# Altium PCB PCB.pcbdoc (part 3 of 3)
Units mm, origin at the board's own origin, x right, y up, seen from the top; angles counter-clockwise.
Board outline 351.03 x 186.31 mm, 2 copper layers (Top Layer, Bottom Layer); 478 components, 293 nets, 1523 pads, 747 vias.
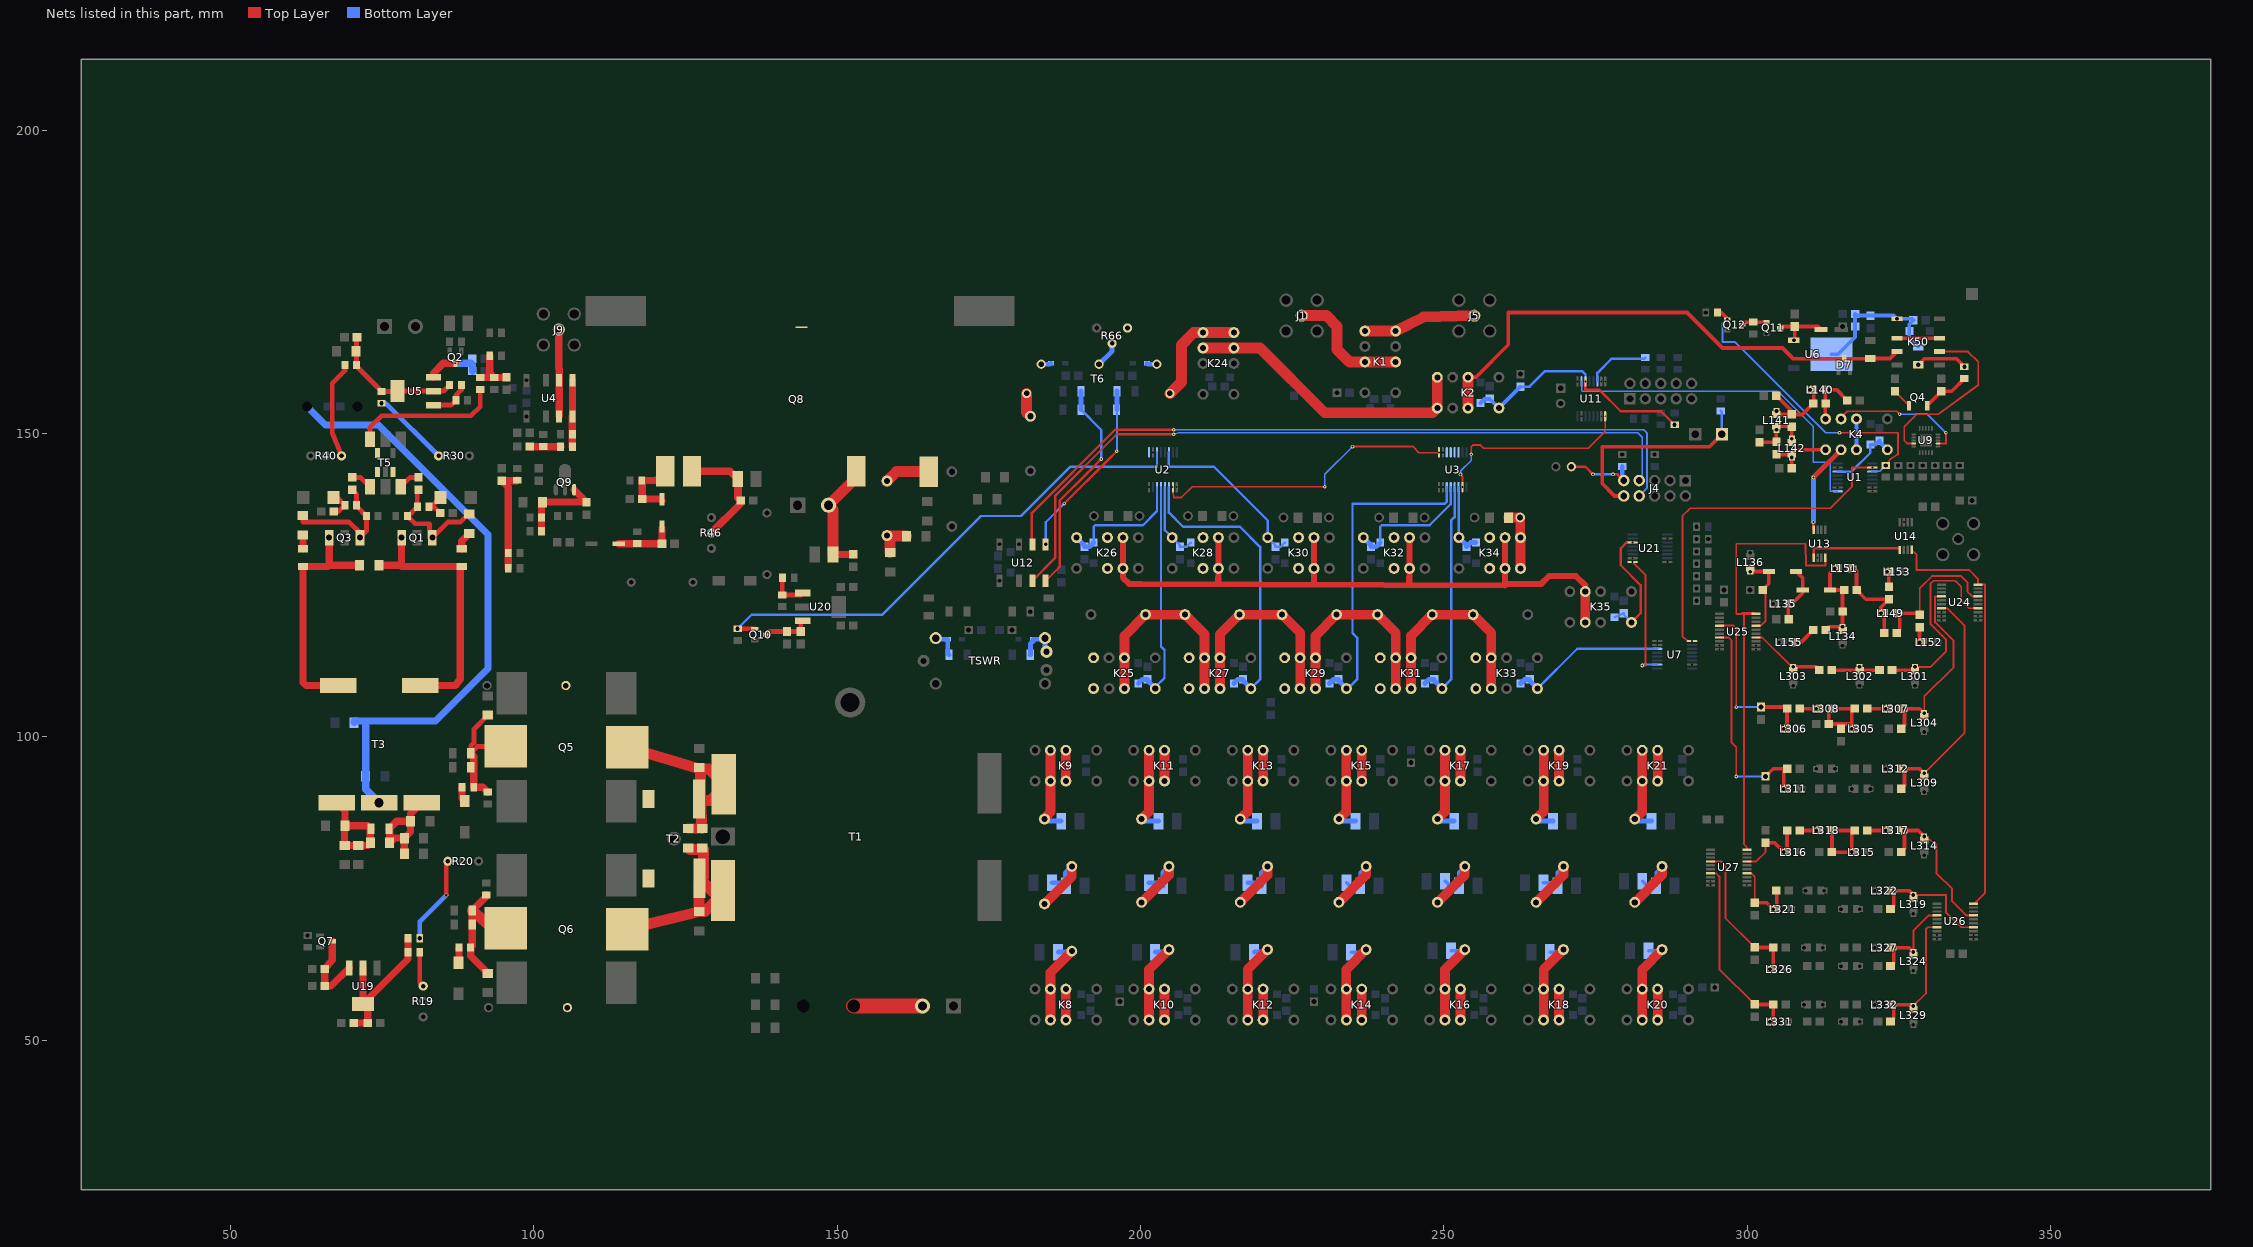
[diagram p3: the nets of this part, all layers, seen from the top]

## Via types
v1: diameter 1, hole 0.61, Top Layer to Bottom Layer, 525 vias
v2: diameter 0.61, hole 0.305, Top Layer to Bottom Layer, 207 vias
v3: diameter 4, hole 3.1, Top Layer to Bottom Layer, 7 vias
v4: diameter 0.61, hole 0.306, Top Layer to Bottom Layer, 3 vias
v5: diameter 0.5, hole 0.305, Top Layer to Bottom Layer, 3 vias
v6: diameter 0.61, hole 0.4, Top Layer to Bottom Layer, 1 vias
v7: diameter 1, hole 0.4, Top Layer to Bottom Layer, 1 vias

## Nets (pads, with @x,y where several pads share a name; then routed paths per layer and width w, separated by ;. In a path a pad name is that pad's centre, name@x,y a point inside that pad or via, vN(x,y) a via of type N, cw(c..) or ccw(c..) an arc to the next point about the centre after c; other vN are vias at no path point) (continued)
K1_8: J5.5 K1.5 K1.8 | length 18.6
  Top Layer w1.8: K1.8@236.982,166.878 K1.5@242.062,166.878 ; K1.5@242.072,166.888 246.634,169.164 J5.5@255.026,169.428
K1_10: J1.5 K1.3 K1.10 | length 20.9
  Top Layer w1.8: J1.5@226.568,169.418 230.632,169.418 232.41,167.64 232.41,163.83 234.442,161.798 K1.10@236.982,161.798 K1.3@242.062,161.798
K4_5: C201.1 C204.2 K4.5 L140.1 | length 11.5
  Top Layer w0.61: K4.5@312.928,152.4 312.878,152.45 L140.1@312.878,157.226 ; C201.1@312.942,154.94 312.878,155.004 L140.1@312.878,157.226 ; C204.2@316.47,155.448 314.692,157.226 L140.1@312.878,157.226
K4_8: C203.2 C210.1 K4.8 L142.2 | length 10.8
  Top Layer w0.61: C203.2@304.8,146.544 307.276,146.544 307.34,146.608 308.052,147.32 K4.8@312.928,147.32 ; L142.2@307.34,146.609 C210.1@307.354,144.272
K4_10: K4.3 K4.10 | length 5.1
  Bottom Layer w0.61: K4.10@318.008,147.32 K4.3@318.008,152.4
K8_9: C12.2 K8.4 K8.9 L7.1 | length 15.1
  Top Layer w1.6: K8.9@185.166,53.34 K8.4@185.166,58.42 185.166,61.163 L7.1@188.686,64.683
  Bottom Layer w0.8: C12.2@186.505,64.516 188.519,64.516 L7.1@188.686,64.683
K8_10: K8.3 K8.10 | length 5.1
  Top Layer w1.6: K8.10@187.706,53.34 K8.3@187.706,58.42
K9_10: K9.3 K9.10 | length 5.1
  Top Layer w1.6: K9.10@187.706,92.71 K9.3@187.706,97.79
K10_10: K10.3 K10.10 | length 5.1
  Top Layer w1.6: K10.10@203.962,53.34 K10.3@203.962,58.42
K11_9: C20.2 K11.4 K11.9 L11.2 | length 14.8
  Top Layer w1.6: L11.2@200.188,86.447 201.422,87.681 K11.9@201.422,92.71 K11.4@201.422,97.79
  Bottom Layer w0.8: L11.2@200.188,86.447 200.529,86.106 C20.2@202.953,86.106
K11_10: K11.3 K11.10 | length 5.1
  Top Layer w1.6: K11.10@203.962,92.71 K11.3@203.962,97.79
K12_9: C22.2 K12.4 K12.9 L13.1 | length 15.3
  Top Layer w1.6: K12.9@217.678,53.34 K12.4@217.678,58.42 217.678,61.671 L13.1@220.944,64.937
  Bottom Layer w0.8: C22.2@218.763,64.516 220.523,64.516 L13.1@220.944,64.937
K12_10: K12.3 K12.10 | length 5.1
  Top Layer w1.6: K12.10@220.218,53.34 K12.3@220.218,58.42
K13_10: K13.3 K13.10 | length 5.1
  Top Layer w1.6: K13.10@220.218,92.71 K13.3@220.218,97.79
K14_9: C27.2 K14.4 K14.9 L16.1 | length 15.6
  Top Layer w1.6: K14.9@233.934,53.34 K14.4@233.934,58.42 233.934,61.671 L16.1@237.2,64.937
  Bottom Layer w0.61: C27.2@234.765,64.516 236.779,64.516 L16.1@237.2,64.937
K14_10: K14.3 K14.10 | length 5.1
  Top Layer w1.6: K14.10@236.474,53.34 K14.3@236.474,58.42
K15_10: K15.3 K15.10 | length 5.1
  Top Layer w1.6: K15.10@236.474,92.71 K15.3@236.474,97.79
K16_9: C32.2 K16.4 K16.9 L19.1 | length 15.2
  Top Layer w1.6: K16.9@250.19,53.34 K16.4@250.19,58.42 250.19,61.671 L19.1@253.456,64.937
  Bottom Layer w0.61: C32.2@251.275,64.77 253.289,64.77 L19.1@253.456,64.937
K16_10: K16.3 K16.10 | length 5.1
  Top Layer w1.6: K16.10@252.73,53.34 K16.3@252.73,58.42
K17_10: K17.3 K17.10 | length 5.1
  Top Layer w1.6: K17.10@252.73,92.71 K17.3@252.73,97.79
K18_9: C37.2 K18.4 K18.9 L22.1 | length 15.3
  Top Layer w1.6: K18.9@266.446,53.34 K18.4@266.446,58.42 266.446,61.671 L22.1@269.712,64.937
  Bottom Layer w0.61: C37.2@267.531,64.516 269.291,64.516 L22.1@269.712,64.937
K18_10: K18.3 K18.10 | length 5.1
  Top Layer w1.6: K18.10@268.986,53.34 K18.3@268.986,58.42
K19_10: K19.3 K19.10 | length 5.1
  Top Layer w1.6: K19.10@268.986,92.71 K19.3@268.986,97.79
K20_9: C43.2 K20.4 K20.9 L25.1 | length 15.2
  Top Layer w1.6: K20.9@282.702,53.34 K20.4@282.702,58.42 282.702,61.671 L25.1@285.968,64.937
  Bottom Layer w0.61: C43.2@283.787,64.77 285.801,64.77 L25.1@285.968,64.937
K20_10: K20.3 K20.10 | length 5.1
  Top Layer w1.6: K20.10@285.242,53.34 K20.3@285.242,58.42
K21_10: K21.3 K21.10 | length 5.1
  Top Layer w1.6: K21.10@285.242,92.71 K21.3@285.242,97.79
K25_5: K25.5
K25_8: K25.8
K25_10: K25.3 K25.10 K27.4 K27.9 L35.2 L36.1 | length 33.7
  Top Layer w1.6: K25.10@197.358,107.95 K25.3@197.358,113.03 197.358,116.658 L35.2@200.842,120.142 L36.1@207.336,120.142 210.566,116.912 K27.4@210.566,113.03 K27.9@210.566,107.95
K26_3: K26.3
K26_10: K26.10
K27_5: K27.5
K27_8: K27.8
K27_10: K27.3 K27.10 K29.4 K29.9 L36.2 L39.1 | length 34
  Top Layer w1.6: K27.10@213.106,107.95 K27.3@213.106,113.03 213.106,116.912 L36.2@216.336,120.142 L39.1@223.338,120.142 226.314,117.166 K29.4@226.314,113.03 K29.9@226.314,107.95
K28_3: K28.3
K28_10: K28.10
K29_5: K29.5
K29_8: K29.8
K29_10: K29.3 K29.10 K31.4 K31.9 L39.2 L41.1 | length 33.8
  Top Layer w1.6: K29.10@228.854,107.95 K29.3@228.854,113.03 228.854,116.658 L39.2@232.338,120.142 L41.1@239.086,120.142 242.062,117.166 K31.4@242.062,113.03 K31.9@242.062,107.95
K30_3: K30.3
K30_10: K30.10
K31_5: K31.5
K31_8: K31.8
K31_10: K31.3 K31.10 K33.4 K33.9 L41.2 L42.1 | length 33.8
  Top Layer w1.6: K31.10@244.602,107.95 K31.3@244.602,113.03 244.602,116.658 L41.2@248.086,120.142 L42.1@254.834,120.142 257.81,117.166 K33.4@257.81,113.03 K33.9@257.81,107.95
K32_3: K32.3
K32_10: K32.10
K33_5: K33.5
K33_8: K33.8
K34_3: K34.3
K34_8: C88.1 C100.1 K34.5 K34.8 | length 10.3
  Top Layer w1.6: C88.1@260.673,136.144 C100.1@262.576,136.144 262.576,132.902 K34.8@262.636,132.842 K34.5@262.636,127.762
K34_10: K34.10
K35_9: K26.4 K26.9 K28.4 K28.9 K30.4 K30.9 K32.4 K32.9 K34.4 K34.9 K35.4 K35.9 | length 121.4
  Top Layer w1: K26.9@197.104,132.842 K26.4@197.104,127.762 197.104,126.238 198.12,125.222 200.152,125.222 260.096,124.968 K34.4@260.096,127.762 K34.9@260.096,132.842 ; 212.827,125.171 K28.4@212.852,127.762 K28.9@212.852,132.842 ; 228.599,125.095 K30.4@228.6,127.762 K30.9@228.6,132.842 ; 244.297,125.044 K32.4@244.348,127.762 K32.9@244.348,132.842 ; 260.223,125.222 262.509,125.222 266.065,125.222 267.335,126.492 271.78,126.492 273.304,124.968 K35.4@273.304,123.952
  Top Layer w1.6: K35.9@273.304,118.872 K35.4@273.304,123.952
K50_2: K50.2 K50.7 | length 7
  Top Layer w0.61: K50.2@324.668,165.7 K50.7@331.668,165.7
L1_2: C2.2 C4.2 L1.2 | length 6.3
  Top Layer w1.8: C4.2@158.75,130.371 158.75,132.66 L1.2@158.242,133.168 158.314,133.096 C2.2@161.475,133.096
L7_2: C13.2 C14.2 L7.2 L8.1 | length 14.1
  Top Layer w1.6: L7.2@184.186,72.477 188.686,76.977 L8.1@188.686,78.653
  Bottom Layer w0.8: C13.2@185.413,75.946 187.129,75.946 187.637,75.438 187.637,77.604 L8.1@188.686,78.653
L8_2: C15.2 K9.4 K9.9 L8.2 | length 14.6
  Top Layer w1.6: L8.2@184.186,86.447 185.166,87.63 K9.9@185.166,92.71 K9.4@185.166,97.79
  Bottom Layer w0.8: L8.2@184.186,86.447 184.527,86.106 C15.2@186.951,86.106
L10_1: C17.2 K10.4 K10.9 L10.1 | length 15.3
  Top Layer w1.6: K10.9@201.422,53.34 K10.4@201.422,58.42 201.422,61.671 L10.1@204.688,64.937
  Bottom Layer w0.8: C17.2@202.507,64.516 204.267,64.516 L10.1@204.688,64.937
L11_1: C18.2 C19.2 L10.2 L11.1 | length 13.9
  Top Layer w1.6: L10.2@200.188,72.731 204.688,77.231 L11.1@204.688,78.653
  Bottom Layer w0.8: C19.2@201.415,75.946 203.207,75.946 C18.2@203.715,75.438 203.715,77.68 L11.1@204.688,78.653
L13_2: C23.2 C24.2 L13.2 L14.1 | length 13.9
  Top Layer w1.6: L13.2@216.444,72.731 220.944,77.231 L14.1@220.944,78.653
  Bottom Layer w0.8: C23.2@217.671,75.946 219.463,75.946 C24.2@219.971,75.438 219.971,77.68 L14.1@220.944,78.653
L14_2: C25.2 K13.4 K13.9 L14.2 | length 14.8
  Top Layer w1.6: L14.2@216.444,86.447 217.678,87.681 K13.9@217.678,92.71 K13.4@217.678,97.79
  Bottom Layer w0.8: L14.2@216.444,86.447 216.785,86.106 C25.2@219.209,86.106
L16_2: C28.2 C29.2 L16.2 L17.1 | length 13.8
  Top Layer w1.6: L16.2@232.7,72.731 237.2,77.231 L17.1@237.2,78.653
  Bottom Layer w0.61: C29.2@234.003,75.946 234.511,75.438 C28.2@236.227,75.438 236.227,77.679 L17.1@237.2,78.653
L17_2: C30.2 K15.4 K15.9 L17.2 | length 14.8
  Top Layer w1.6: L17.2@232.7,86.447 233.934,87.681 K15.9@233.934,92.71 K15.4@233.934,97.79
  Bottom Layer w0.8: L17.2@232.7,86.447 233.041,86.106 C30.2@235.465,86.106
L19_2: C33.2 C34.2 L19.2 L20.1 | length 13.9
  Top Layer w1.6: L19.2@248.956,72.731 253.456,77.231 L20.1@253.456,78.653
  Bottom Layer w0.61: C33.2@250.259,76.2 251.021,75.438 C34.2@252.483,75.438 252.483,77.679 L20.1@253.456,78.653
L20_2: C35.2 K17.4 K17.9 L20.2 | length 14.8
  Top Layer w1.6: L20.2@248.956,86.447 250.19,87.681 K17.9@250.19,92.71 K17.4@250.19,97.79
  Bottom Layer w0.8: L20.2@248.956,86.447 249.297,86.106 C35.2@251.721,86.106
L22_2: C39.2 C40.2 L22.2 L23.1 | length 13.9
  Top Layer w1.6: L22.2@265.212,72.731 269.712,77.231 L23.1@269.712,78.653
  Bottom Layer w0.61: C39.2@266.439,75.946 268.231,75.946 C40.2@268.739,75.438 268.739,77.679 L23.1@269.712,78.653
L23_2: C41.2 K19.4 K19.9 L23.2 | length 14.8
  Top Layer w1.6: L23.2@265.212,86.447 266.446,87.681 K19.9@266.446,92.71 K19.4@266.446,97.79
  Bottom Layer w0.8: L23.2@265.212,86.447 265.553,86.106 C41.2@267.977,86.106
L25_2: C44.2 C45.2 L25.2 L26.1 | length 13.9
  Top Layer w1.6: L25.2@281.468,72.731 285.968,77.231 L26.1@285.968,78.653
  Bottom Layer w0.61: C44.2@282.771,76.2 283.533,75.438 C45.2@284.995,75.438 284.995,77.679 L26.1@285.968,78.653
L26_2: C46.2 K21.4 K21.9 L26.2 | length 14.8
  Top Layer w1.6: L26.2@281.468,86.447 282.702,87.681 K21.9@282.702,92.71 K21.4@282.702,97.79
  Bottom Layer w0.8: L26.2@281.468,86.447 281.809,86.106 C46.2@284.233,86.106
L30_2: J6.2 L30.2 pad.1 | length 11.3
  Top Layer w2.5: L30.2@152.74,55.626 J6.2@164.084,55.626
L32_2: C65.2 C66.1 C72.2 L32.2 | length 9.7
  Top Layer w1.2: C65.2@114.01,131.826 C72.2@121.144,131.826 ; C72.2@121.144,131.826 C66.1@121.158,134.402
L43_1: C95.2 C105.2 L43.1 T3.P3 | length 100.1
  Bottom Layer w1.2: L43.1@62.652,154.432 65.7,151.384 74.422,151.384 92.456,133.35 92.456,111.252 83.82,102.616 70.427,102.616 C95.2@70.427,102.362 ; 72.321,101.854 C105.2@72.321,93.472 72.321,91.357 T3.P3@74.524,89.154
L46_2: L46.2 R39.1 | length 8.6
  Top Layer w0.61: R39.1@328.168,161.29 329.184,162.306 334.468,162.306 L46.2@335.788,160.986
L135_2: C386.2 C387.1 C389.2 L135.2 | length 9.1
  Top Layer w0.61: L135.2@306.782,121.92 306.782,119.444 C389.2@306.846,119.38 ; L135.2@307.366,121.94 309.154,123.728 C386.2@309.154,124.206 309.154,126.166 C387.1@308.066,127.254
L140_2: C201.2 C202.1 C207.2 L140.2 L141.1 | length 15.8
  Top Layer w0.61: L141.1@304.8,153.112 309.053,153.111 C201.2@310.882,154.94 310.946,155.004 L140.2@310.946,157.226 ; L141.1@304.8,153.112 304.864,153.176 307.34,153.176 307.34,153.685 C207.2@304.814,156.21
L141_2: C202.2 C203.1 C208.2 L141.2 L142.1 | length 13.1
  Top Layer w0.61: C208.2@302.006,148.576 304.772,148.576 304.8,148.604 304.8,151.129 L141.2@304.851,151.18 ; L142.1@307.34,148.54 C202.2@307.34,151.116 ; C202.2@307.276,151.18 C202.2@307.34,151.116 ; C202.2@307.276,151.18 L141.2@304.8,151.18 C202.2@307.276,151.18 ; C202.2@307.276,151.18 C202.2@307.34,151.116
L149_2: C308.2 C310.1 C317.2 L149.2 L151.1 | length 16
  Top Layer w0.61: L151.1@317.526,127.742 318.022,127.246 C310.1@318.022,124.206 ; C310.1@318.022,124.206 319.547,122.669 C317.2@323.342,122.669 ; C308.2@322.566,117.094 322.566,119.856 L149.2@322.046,120.376 322.046,121.372 C317.2@323.342,122.668
L151_2: C310.2 C319.2 C386.1 C388.2 L134.2 L151.2 | length 15.3
  Top Layer w0.61: C319.2@312.942,117.602 313.476,118.136 L134.2@315.702,118.136 315.702,123.946 C310.2@315.962,124.206 C386.1@313.654,124.206 313.654,126.97 L151.2@314.426,127.742
L152_2: C316.1 L152.2 | length 2.6
  Top Layer w0.61: L152.2@328.396,115.55 328.396,118.07 C316.1@328.422,118.096
L153_2: C317.1 L153.2 | length 2.6
  Top Layer w0.61: L153.2@323.062,127.234 323.342,126.954 C317.1@323.342,124.728
L155_2: C319.1 L155.2 | length 3.9
  Top Layer w0.61: L155.2@307.798,115.57 308.85,115.57 C319.1@310.882,117.602
L302_2: C305.2 C306.1 L302.2 | length 7.8
  Top Layer w0.61: C306.1@313.958,110.998 C305.2@321.804,110.998
L305_2: C307.2 C311.2 C314.2 L305.2 L308.1 | length 14.8
  Top Layer w0.61: L305.2@317.22,101.326 317.22,104.128 C311.2@317.74,104.648 L308.1@313.894,104.648 313.45,104.204 C314.2@313.45,102.108 317.042,102.108 L305.2@317.804,101.346
L307_2: C311.1 L307.2 | length 3
  Top Layer w0.61: C311.1@319.8,104.648 L307.2@322.808,104.628
L308_2: C312.1 L308.2 | length 2.8
  Top Layer w0.61: C312.1@308.624,104.648 L308.2@311.378,104.628
L315_2: C332.2 C335.2 L315.2 L318.1 | length 14.1
  Top Layer w0.61: C335.2@313.958,81.026 313.958,84.042 L318.1@314.478,84.562 C332.2@317.74,84.582 ; C335.2@313.958,81.026 L315.2@317.22,81.006 317.22,84.062 C332.2@317.74,84.582
L317_2: C332.1 L317.2 | length 3
  Top Layer w0.61: C332.1@319.8,84.582 L317.2@322.808,84.562
L318_2: C333.1 L318.2 | length 2.8
  Top Layer w0.61: C333.1@308.624,84.582 L318.2@311.378,84.562
LNAON: Q12.1 R57.2 R75.1 U1.3 | length 50.7
  Top Layer w0.305: v2(315.214,150.114) 324.866,150.114 324.866,149.606 324.866,146.558 323.596,145.796 R57.2@322.834,144.73
  Top Layer w0.61: R75.1@295.098,169.926 295.725,169.926 Q12.1@296.807,168.844
  Bottom Layer w0.305: Q12.1@296.926,168.91 296.672,168.91 295.91,168.148 295.91,165.1 297.942,165.1 312.928,150.114 v2(315.214,150.114) ; U1.3@320.548,143.764 321.868,143.764 R57.2@322.834,144.73
LPFON: C123.1 D9.2 K4.12 U1.14 | length 11.9
  Bottom Layer w0.4: U1.14@314.888,143.723 317.205,143.723 320.294,146.812 D9.2@320.294,148.16
  Bottom Layer w0.61: D9.2@320.294,148.16 321.148,148.16 C123.1@321.818,148.83 321.818,148.59 K4.12@323.088,147.32
MBALC: D2.1 J4.10 R12.1 | length 35
  Top Layer w0.61: J4.10@279.654,139.7 278.13,139.7 276.098,141.732 276.098,147.828 293.792,147.828 D2.1@295.824,149.86
  Bottom Layer w0.4: R12.1@295.656,153.72 295.824,153.552 D2.1@295.824,149.86
MBTHERM: J4.9 R13.2 R14.2 | length 12
  Top Layer w0.4: R14.2@271.018,144.526 273.304,144.526 v2(274.574,143.256) ; v2(277.876,143.256) 278.638,143.256 J4.9@279.654,142.24
  Bottom Layer w0.4: v2(274.574,143.256) v2(277.876,143.256)
  Bottom Layer w0.8: R13.2@279.4,144.576 279.4,142.494 J4.9@279.654,142.24
Q1_3: C93.1 Q1.3 R59.1 T3.P1 | length 44.2
  Top Layer w1.2: C93.1@74.491,128.27 78.232,128.27 ; Q1.3@78.232,132.842 78.232,128.27 ; T3.P1@81.28,108.458 87.122,108.458 87.884,109.474 87.884,127.813 R59.1@88.138,128.067 ; R59.1@88.138,128.061 78.232,128.061 78.232,128.27
Q3_3: C93.2 Q3.3 R60.2 T3.P2 | length 39.1
  Top Layer w1.2: Q3.3@66.294,132.842 66.294,128.27 ; T3.P2@67.818,108.458 62.484,108.458 61.976,108.966 R60.2@61.976,128.061 66.085,128.061 66.294,128.27 ; C93.2@71.305,128.27 66.294,128.27
Q4_1: C112.2 Q4.1 | length 3.3
  Top Layer w0.305: C112.2@324.358,156.958 324.358,156.91 Q4.1@326.668,154.6
Q4_3: C120.2 L46.1 Q4.3 | length 8
  Top Layer w0.61: Q4.3@329.668,154.6 331.978,156.91 C120.2@331.978,156.958 333.692,156.958 L46.1@335.788,159.054
Q5_D: C52.1 C57.2 C60.2 Q5.D T1.2 T2.4 | length 34.9
  Top Layer w1.6: C57.2@125.476,84.905 C60.2@127.762,84.905
  Top Layer w1.8: Q5.D@115.443,98.298 C52.1@127.508,94.673 ; T2.4@127.522,89.504 129.128,89.504 131.572,91.948 128.847,94.673 C52.1@127.508,94.673 ; C60.2@127.762,84.905 127.523,89.505 C52.1@127.508,94.673
Q6_D: C56.2 C57.1 C60.1 Q6.D T1.1 T2.3 | length 36.2
  Top Layer w1.8: Q6.D@116.136,67.633 Q6.D@115.443,68.326 C56.2@127.254,71.189 ; C57.1@125.73,81.465 128.016,81.465 128.016,76.872 T2.3@127.573,76.429 ; C56.2@127.254,71.189 127.254,76.11 T2.3@127.573,76.429 ; C56.2@127.254,71.189 128.212,71.189 131.445,74.422 129.58,74.422 T2.3@127.573,76.429
Q8_1: C66.2 C73.2 L34.2 Q8.1 | length 11
  Top Layer w1.2: C66.2@121.158,138.902 120.868,139.192 C73.2@117.87,139.192 117.87,142.176 L34.2@117.806,142.24 120.142,142.24 Q8.1@121.666,143.764
Q8_2: C75.1 C77.1 Q8.2 R46.2 | length 22.9
  Top Layer w0.4: C77.1@133.627,142.494 134.098,142.023 C75.1@134.098,138.938
  Top Layer w1.2: Q8.2@126.111,143.764 132.357,143.764 C77.1@133.627,142.494 133.627,139.409 C75.1@134.098,138.938 134.098,138.426 R46.2@129.286,133.614
Q8_3: C70.1 C74.1 J7.2 Q8.3 | length 19.2
  Top Layer w1.2: C74.1@149.329,130.048 C70.1@152.654,130.061
  Top Layer w1.8: C74.1@149.329,130.048 149.329,137.437 J7.2@148.59,138.176 153.162,142.748 Q8.3@153.162,143.764
Q8_4: L1.1 Q8.4 | length 7.5
  Top Layer w1.8: L1.1@158.242,142.168 159.775,143.701 Q8.4@165.1,143.701
Q8_5: Q8.5
Q9_D: C67.1 L31.1 Q9.D R21.1 R22.1 | length 15.1
  Top Layer w1.2: R22.1@101.296,133.858 101.296,138.566 L31.1@101.415,138.684 108.712,138.697 Q9.D@106.656,140.736
Q11_1: Q11.1 Q12.3 R48.1 | length 4.2
  Top Layer w0.61: Q12.3@299.077,167.894 299.535,168.352 R48.1@300.99,168.352 ; R48.1@300.99,168.352 Q11.1@303.093,168.336
R1_2: R1.2 T2.2
R2_2: R2.2 T2.1
R5_1: D35.1 R5.1 | length 2.8
  Top Layer w1.2: D35.1@87.63,62.509 87.68,62.559 R5.1@87.68,65.278
R5_2: C54.1 Q6.G R5.2 R47.2 R76.2 R77.1 | length 21.6
  Top Layer w1.2: R5.2@89.612,65.278 89.611,63.873 C54.1@92.456,61.029 ; R5.2@89.612,65.278 89.871,65.537 R47.2@89.871,71.374 92.202,73.705 R77.1@92.202,73.964
  Top Layer w1.8: R47.2@89.871,71.374 92.202,69.342 Q6.G@95.377,68.453
R6_1: D36.1 R6.1 | length 2.5
  Top Layer w1.2: R6.1@88.188,91.694 88.188,89.892 D36.1@88.646,89.434
R6_2: C53.1 Q5.G R6.2 R38.2 R74.2 R78.2 | length 22.2
  Top Layer w0.8: C53.1@92.456,103.563 90.17,101.277 90.17,99.06 89.617,98.507 R38.2@89.617,97.282 90.76,98.425 Q5.G@95.377,98.425
  Top Layer w1.2: R38.2@89.617,97.282 90.12,96.779 R6.2@90.12,91.694 91.644,91.694 R78.2@92.456,90.882
R15_1: C59.1 C62.1 R15.1 R16.1 U19.2 U19.4 | length 25.6
  Top Layer w1.2: C59.1@70.372,52.832 C62.1@72.63,52.832 72.63,55.21 U19.4@71.882,55.958 U19.2@71.882,61.898 ; U19.4@71.882,55.958 79.299,63.373 R16.1@79.298,64.516 ; R16.1@79.298,64.516 R15.1@79.298,66.802
R15_2: R15.2 R20.3 | length 14.6
  Top Layer w0.8: v6(85.598,73.914) 85.598,79.258 R20.3@85.842,79.502
  Bottom Layer w0.8: R15.2@81.23,66.802 81.23,69.546 v6(85.598,73.914)
R16_2: R16.2 R19.1 | length 5.8
  Top Layer w0.8: R16.2@81.23,64.516 81.23,59.496 R19.1@81.788,58.938
R23_1: C71.1 R23.1 R24.2 | length 5.1
  Top Layer w1.2: C71.1@99.328,147.828 R23.1@104.444,147.828
R26_1: C76.2 R26.1 R32.2 R37.2 | length 17.5
  Top Layer w1.2: R32.2@95.808,127.762 R37.2@95.808,130.302 95.808,141.16 C76.2@94.742,142.226 97.218,142.226 R26.1@97.282,142.29
R27_1: C114.1 D18.1 R27.1 | length 4.7
  Top Layer w0.8: C114.1@84.568,136.906 83.552,137.922 R27.1@82.754,137.922 83.098,137.922 D18.1@84.622,139.446
R27_2: C38.1 C111.2 Q1.1 R27.2 R42.2 | length 19.7
  Top Layer w0.8: R42.2@79.198,136.398 80.467,135.128 82.804,135.128 82.804,132.842 Q1.1@83.312,132.842 85.852,135.382 87.884,135.382 89.223,136.721 C111.2@89.408,136.721 ; R42.2@79.198,136.398 79.298,136.398 R27.2@80.822,137.922 80.822,140.498 C38.1@81.026,140.702
R28_1: C128.1 C137.1 R28.1 R29.1 R52.2 U5.2 U5.4 | length 22.3
  Top Layer w0.8: C137.1@70.88,165.862 70.816,165.798 R29.1@70.816,161.29 70.816,161.036 R28.1@74.93,156.922 77.498,156.922 U5.4@77.548,156.972 U5.2@83.488,156.972 85.14,156.972 R52.2@86.156,157.988
R28_2: R28.2 R30.1 | length 13
  Bottom Layer w0.8: R28.2@74.93,154.99 75.631,154.991 R30.1@84.318,146.304
R29_2: R29.2 R40.3 | length 16.1
  Top Layer w0.8: R40.3@68.336,146.304 66.802,150.114 66.802,158.242 68.884,160.324 R29.2@68.884,161.29
R34_1: C91.2 C92.1 C94.1 C101.1 R34.1 T3.S1 | length 18.7
  Top Layer w1.2: C92.1@78.671,80.772 C94.1@78.671,83.312 ; T3.S1@81.534,89.154 79.687,87.307 C91.2@79.687,86.106 ; C94.1@78.671,83.312 77.031,83.312 C101.1@76.269,82.55 76.269,84.722 R34.1@76.155,84.836 77.425,86.106 C91.2@79.687,86.106 ; C94.1@78.671,83.312 79.687,84.328 C91.2@79.687,86.106
R34_2: C101.2 C102.1 C103.2 C104.1 R34.2 T3.S2 | length 18.9
  Top Layer w1.2: T3.S2@67.564,89.154 68.903,87.815 C103.2@68.903,85.344 ; C103.2@68.903,85.344 68.834,85.275 C104.1@68.834,82.111 72.644,82.111 C101.2@73.083,82.55 73.083,84.722 R34.2@73.197,84.836 72.689,85.344 C103.2@68.903,85.344
R39_2: C121.2 C122.2 C127.2 C133.1 D51.1 K50.1 R39.2 U6.4 | length 24.1
  Bottom Layer w0.61: U6.4@313.893,163.068 314.96,163.068 317.754,165.862 C121.2@317.768,167.64 ; C121.2@317.768,167.64 C122.2@317.768,169.672 318.008,169.432 C127.2@320.294,169.432 324.136,169.432 K50.1@324.668,168.9 327.148,168.9 C133.1@327.392,168.656 326.722,167.986 D51.1@326.722,166.878 326.722,165.739 R39.2@328.168,164.293
R44_1: C116.2 D23.1 R44.1 | length 4.6
  Top Layer w0.8: D23.1@67.016,139.446 67.614,139.446 R44.1@68.884,138.176 67.868,137.16 C116.2@67.07,137.16
R44_2: C80.1 C81.2 Q3.1 R43.1 R44.2 | length 21.3
  Top Layer w0.8: C81.2@61.976,136.467 61.976,135.382 69.596,135.382 71.374,133.604 Q3.1@71.374,132.842 72.44,133.908 R43.1@72.44,136.398 70.816,138.022 R44.2@70.816,138.176 70.816,139.99 C80.1@70.104,140.702
R59_2: C111.1 R59.2 | length 3
  Top Layer w1.2: R59.2@88.138,131.019 88.138,132.265 C111.1@89.408,133.535
R60_1: C81.1 R60.1 | length 2.3
  Top Layer w1.2: R60.1@61.976,131.019 C81.1@61.976,133.281
R62_2: C55.2 L48.1 R61.1 R62.2 | length 8.2
  Top Layer w1.2: L48.1@91.186,159.208 95.44,159.208 C55.2@95.504,159.272 ; R61.1@92.76,162.814 92.76,159.92 R62.2@93.472,159.208
R66_1: R66.1
RXATTOUT: K4.4 U9.2 | length 22.5
  Top Layer w0.305: K4.4@315.468,152.4 315.468,152.654 316.484,153.67 324.612,153.67 v4(325.12,153.162) ; U9.2@331.445,148.336 332.74,148.336 v4(332.74,150.114)
  Bottom Layer w0.305: v4(325.12,153.162) 329.692,153.162 v4(332.74,150.114)
RXINLNA: D7.3 K2.3 K2.10 K50.3 R73.2 | length 87
  Top Layer w0.61: K2.3@254,159.258 255.311,159.263 260.604,164.602 260.604,169.926 290.068,169.926 295.91,164.084 305.816,164.084 307.609,162.291 D7.3@315.976,162.29 ; D7.3@315.976,162.29 320.233,162.29 R73.2@320.294,162.351 323.519,162.351 K50.3@324.668,163.5
  Top Layer w1.8: K2.10@254,154.178 K2.3@254,159.258
RXLNAATT: K50.6 U9.14 | length 29.6
  Top Layer w0.305: U9.14@327.431,148.336 326.39,148.336 325.882,148.844 325.882,151.13 327.914,153.162 331.47,153.162 338.074,157.988 338.074,161.798 336.372,163.5 K50.6@331.668,163.5
RXLPFBPF: K4.9 U13.4 | length 15.1
  Top Layer w0.4: v2(310.896,135.382) 310.896,134.167 U13.4@310.937,134.126
  Top Layer w0.8: v2(310.896,142.748) K4.9@315.468,147.32
  Bottom Layer w0.8: v2(310.896,135.382) v2(310.896,142.748)
S$39: 
S$43: 
S$46: 
S$48: 
SWRDETBACKW: J4.8 U12.6 | length 123.4
  Top Layer w0.4: U12.6@182.184,131.73 182.118,131.796 182.118,136.906 195.834,150.622 v2(205.486,150.622)
  Bottom Layer w0.305: v2(205.486,150.622) 207.419,150.622 209.08,150.622 269.982,150.622 271.767,150.622 282.956,150.622 283.464,150.114 283.464,140.97 J4.8@282.194,139.7
SWRDETFORW: J4.7 U12.3 | length 124.2
  Top Layer w0.4: U12.3@182.184,125.73 185.928,129.474 185.928,139.7 196.088,149.86 v2(205.486,149.86)
  Bottom Layer w0.305: v2(205.486,149.86) 206.248,150.114 281.94,150.114 282.702,149.352 282.702,142.748 J4.7@282.194,142.24
T5_1: C38.2 T5.1 | length 3.6
  Top Layer w0.8: T5.1@78.092,141.199 79.656,142.762 C38.2@81.026,142.762
T5_3: C80.2 T5.3 | length 3.6
  Top Layer w0.8: C80.2@70.104,142.762 71.449,142.762 T5.3@73.012,141.199
T5_4: L48.2 T5.4 | length 24.4
  Top Layer w0.8: T5.4@73.012,149.073 73.012,150.99 74.93,152.908 89.662,152.908 91.186,154.432 L48.2@91.186,157.276
T6_3: D49.2 T6.3 | length 1.7
  Bottom Layer w0.8: T6.3@183.642,161.417 185.137,161.417 D49.2@185.263,161.544
T6_4: D50.2 T6.4 | length 1.7
  Bottom Layer w0.8: D50.2@201.071,161.544 201.197,161.417 T6.4@202.692,161.417
T6_5: R66.2 T6.5 | length 4.3
  Bottom Layer w0.8: T6.5@193.167,161.417 195.326,163.576 R66.2@195.326,164.846
TSWR_1: D1.2 R56.1 TSWR.1 | length 4.7
  Bottom Layer w0.8: TSWR.1@166.264,116.272 166.458,116.078 D1.2@168.245,116.078 168.246,113.74 R56.1@168.447,113.538
TSWR_2: D3.2 R55.2 TSWR.2 TSWR.6 | length 7.2
  Bottom Layer w0.8: R55.2@181.819,113.538 181.864,113.583 181.864,115.316 182.274,115.726 D3.2@182.275,116.078 184.07,116.078 TSWR.2@184.264,116.272 184.264,114.272 TSWR.6@184.514,114.022
TUNC1: C158.1 D39.2 K26.12 U2.6 | length 21.9
  Bottom Layer w0.4: D39.2@192.278,132.002 192.278,134.62 192.532,134.874 200.406,134.874 202.733,137.201 U2.6@202.733,141.152
  Bottom Layer w0.8: K26.12@189.484,132.842 190.754,131.572 C158.1@190.754,131.332 191.608,131.332 D39.2@192.278,132.002
TUNC2: C160.1 D41.2 K28.12 U2.4 | length 12.9
  Bottom Layer w0.4: U2.4@204.033,141.152 204.033,134.041 K28.12@205.232,132.842 206.502,131.572 C160.1@206.502,131.332 207.61,131.332 D41.2@208.28,132.002
TUNC3: C162.1 D43.2 K30.12 U2.14 | length 29
  Bottom Layer w0.4: U2.14@204.683,146.884 204.683,144.526 212.09,144.526 220.98,135.636 K30.12@220.98,132.842 222.25,131.572 C162.1@222.25,131.332 223.104,131.332 D43.2@223.774,132.002
TUNC4: C164.1 D45.2 K32.12 U3.5 | length 22.4
  Bottom Layer w0.4: D45.2@239.522,132.002 239.522,134.62 239.776,134.874 247.65,134.874 251.135,138.359 U3.5@251.135,141.152
  Bottom Layer w0.8: K32.12@236.728,132.842 237.998,131.572 C164.1@237.998,131.332 238.852,131.332 D45.2@239.522,132.002
TUNC5: C166.1 D47.2 K34.12 U3.3 | length 12.2
  Bottom Layer w0.4: U3.3@252.435,141.152 252.476,141.111 K34.12@252.476,132.842
  Bottom Layer w0.8: K34.12@252.476,132.842 253.746,131.572 C166.1@253.746,131.332 254.416,132.002 D47.2@255.27,132.002
TUNEOUT: R7.2 U11.6 | length 10.4
  Bottom Layer w0.4: U11.6@275.295,158.568 275.295,159.979 277.622,162.306 283.006,162.306 R7.2@283.21,162.51
TUNL1: C157.1 D38.2 K25.12 U2.5 | length 37.9
  Bottom Layer w0.4: K25.12@202.438,107.95 202.438,108.204 203.962,109.728 203.962,114.3 203.383,114.879 U2.5@203.383,141.152
  Bottom Layer w0.8: D38.2@199.644,108.79 200.314,109.46 201.168,109.46 201.168,109.22 K25.12@202.438,107.95
TUNL2: C159.1 D40.2 K27.12 U2.3 | length 49.4
  Bottom Layer w0.4: U2.3@204.683,141.152 204.683,136.947 207.01,134.62 216.408,134.62 219.71,131.318 219.71,109.474 K27.12@218.186,107.95
  Bottom Layer w0.8: D40.2@215.392,108.79 216.062,109.46 216.916,109.46 216.916,109.22 K27.12@218.186,107.95
TUNL3: C161.1 D42.2 K29.12 U3.6 | length 53.6
  Bottom Layer w0.4: K29.12@233.934,107.95 234.188,107.95 235.712,109.474 235.712,116.332 234.95,117.094 234.95,138.43 250.19,138.43 250.485,138.725 U3.6@250.485,141.152
  Bottom Layer w0.8: D42.2@231.14,108.79 231.81,109.46 232.664,109.46 232.664,109.22 K29.12@233.934,107.95
TUNL4: C163.1 D44.2 K31.12 U3.4 | length 37.9
  Bottom Layer w0.4: K31.12@249.682,107.95 251.206,109.474 251.206,135.636 251.785,136.215 U3.4@251.785,141.152
  Bottom Layer w0.8: D44.2@246.888,108.79 247.558,109.46 248.412,109.46 248.412,109.22 K31.12@249.682,107.95
TUNL5: C165.1 D46.2 K33.12 U7.6 | length 26.3
  Bottom Layer w0.4: K33.12@265.43,107.95 271.993,114.513 U7.6@285.17,114.513
  Bottom Layer w0.8: D46.2@262.636,108.79 263.306,109.46 264.16,109.46 264.16,109.22 K33.12@265.43,107.95
TUNT: C167.1 D48.2 K35.12 U21.14 | length 20.3
  Top Layer w0.4: K35.12@280.924,118.872 282.448,120.396 282.448,124.968 279.146,128.27 279.146,131.064 280.121,132.039 U21.14@281.106,132.039
  Bottom Layer w0.305: C167.1@279.654,120.382 279.654,120.142 K35.12@280.924,118.872
  Bottom Layer w0.4: D48.2@278.13,119.712 C167.1@279.654,120.382
TXLNABYPASS: K2.5 K2.8 K24.4 K24.9 | length 48.4
  Top Layer w1.8: K24.9@210.312,164.084 K24.4@215.392,164.084 219.71,164.084 230.378,153.416 248.158,153.416 K2.8@248.92,154.178 K2.5@248.92,159.258
TXPTTOUT: C110.1 C170.2 D8.2 K2.12 R10.1 U11.3 | length 40.5
  Top Layer w0.4: U11.3@273.304,158.496 273.304,157.226 275.59,157.226 279.146,153.67 285.8,153.67 R10.1@288.036,151.434
  Bottom Layer w0.4: C170.2@262.636,157.72 264.146,157.72 266.7,160.274 272.796,160.274 273.345,159.725 U11.3@273.345,158.568
  Bottom Layer w0.61: D8.2@256.032,155.018 256.702,155.688 C110.1@257.556,155.688 ; C110.1@257.556,155.689 K2.12@259.08,154.178 C170.2@262.636,157.721
U2_2: U2.2 U3.9 | length 50.5
  Top Layer w0.305: U2.2@205.333,141.152 205.486,139.446 206.756,139.446 208.534,141.224 v2(230.378,141.224) ; v2(234.95,147.828) 244.953,147.828 245.872,146.812 U3.9@249.185,146.884
  Bottom Layer w0.305: v2(230.378,141.224) 230.378,143.256 v2(234.95,147.828)
U2_9: U2.9
U3_11: U3.11
U3_12: U3.12
U3_13: U3.13
U3_14: U3.14
U4_3: J9.5 U4.3 U4.6 | length 14
  Top Layer w1.2: J9.5@104.14,167.132 104.14,160.782 104.206,160.716 ; U4.3@104.206,152.908 104.206,158.908 104.206,160.462
U5_1: R52.1 R53.2 U5.1 | length 6.9
  Top Layer w0.8: U5.1@83.488,154.672 86.396,154.672 R53.2@87.172,155.448 87.172,156.26 88.088,157.176 R52.1@88.088,157.988
U5_3: C126.1 C136.1 Q2.3 U5.3 | length 8.9
  Top Layer w1.2: U5.3@83.488,159.272 83.488,159.942 85.106,161.56 Q2.3@87.122,161.56
  Bottom Layer w1.2: Q2.3@87.122,161.56 89.674,161.56 89.902,161.332 C136.1@89.902,160.274
U6_3: C129.1 C130.2 Q11.3 U6.3 | length 9.3
  Top Layer w0.61: Q11.3@305.492,167.386 305.732,167.626 C130.2@307.848,167.626 ; U6.3@307.696,165.354 307.848,165.506 C130.2@307.848,167.626 ; C129.1@312.166,167.132 311.672,167.626 C130.2@307.848,167.626
U7_2: U7.2 U21.9 | length 21
  Top Layer w0.305: U21.9@281.106,128.789 283.21,126.685 283.21,111.76 v2(282.702,111.76)
  Bottom Layer w0.305: v2(282.702,111.76) 282.702,111.913 U7.2@285.17,111.913
U7_9: U1.2 U7.9 | length 58.2
  Top Layer w0.305: U7.9@290.902,115.813 290.078,115.814 289.306,116.586 289.306,136.398 290.576,137.668 313.69,137.668 317.246,141.224 317.246,144.374 U1.2@320.62,144.373
U11_2: U1.9 U11.2 | length 56.8
  Bottom Layer w0.25: U11.2@272.695,158.568 272.694,157.074 272.796,156.972 305.054,156.972 310.896,151.13 310.896,145.288 313.69,145.288 313.68,140.472 U1.9@314.888,140.473
U11_9: U3.2 U11.9 | length 33.6
  Top Layer w0.305: v2(252.73,143.256) 253.085,142.901 U3.2@253.085,141.152 ; v2(254.508,146.558) 254.508,147.828 254.762,148.082 256.032,148.082 256.54,147.574 273.812,147.574 276.596,150.358 U11.9@276.595,152.836
  Bottom Layer w0.305: v2(252.73,143.256) 252.73,143.764 254.508,145.542 v2(254.508,146.558)
U13_5: U13.5 U14.5 | length 15.7
  Top Layer w0.4: U13.5@310.937,129.526 310.937,130.851 311.15,131.064 324.893,131.064 U14.5@325.161,130.796
U13_8: U13.8 U25.10 U27.10 | length 75.9
  Top Layer w0.305: U27.10@299.927,81.411 299.927,81.835 299.466,82.296 299.466,120.142 299.212,120.396 301.328,120.396 U25.10@301.451,120.273 ; U25.10@301.45,120.272 298.196,120.272 298.196,131.826 309.626,131.826 309.71,128.229 312.887,128.229 U13.8@312.887,129.526
U14_8: U14.8 U24.10 U26.10 | length 70
  Top Layer w0.305: U14.8@327.111,130.796 327.914,129.992 327.914,127.508 336.55,127.508 338.026,126.032 338.026,125.098 339.212,125.098 339.212,74.29 337.442,72.52 U26.10@337.264,72.52
U19_3: C63.1 C64.1 Q7.3 U19.3 | length 13.1
  Top Layer w1.2: C64.1@65.546,61.722 65.546,58.928 66.612,58.928 U19.3@69.582,61.898 ; C64.1@65.557,61.722 66.802,63.246 Q7.3@66.786,66.294
U20_1: R51.1 R58.1 U20.1 | length 6.4
  Top Layer w0.8: R58.1@141.02,126.238 140.97,126.188 R51.1@140.97,123.394 144.032,123.394 U20.1@144.35,123.712
U20_3: C79.2 C82.2 Q10.3 U20.3 | length 7.7
  Top Layer w0.8: Q10.3@138.414,116.84 138.936,117.362 C82.2@144.018,117.362 144.018,118.78 U20.3@144.35,119.112
U24_4: C305.1 L301.2 U24.4 | length 34.3
  Top Layer w0.305: L301.2@327.64,111.532 330.226,111.532 332.74,114.046 332.74,116.078 330.2,118.618 330.2,125.222 330.708,125.73 334.264,125.73 335.28,124.714 335.28,122.469 336.55,121.199 U24.4@338.027,121.199 ; U24.4@337.382,121.342 337.525,121.199 U24.4@338.027,121.199
  Top Layer w0.61: C305.1@323.864,110.998 327.106,110.998 L301.2@327.64,111.532
U24_7: C308.1 C316.2 L149.1 U24.7 | length 23.9
  Top Layer w0.305: C316.2@328.422,120.156 328.422,124.46 330.454,126.492 335.28,126.492 336.296,125.476 336.296,123.952 337.099,123.149 U24.7@338.027,123.149
  Top Layer w0.61: C308.1@324.626,117.094 325.146,117.614 L149.1@325.146,120.376 328.202,120.376 C316.2@328.422,120.156
U24_14: C313.2 L304.2 L307.1 U24.14 | length 31.2
  Top Layer w0.305: L304.2@329.184,103.328 329.184,106.68 334.01,111.506 334.01,115.824 330.962,118.872 330.962,123.149 U24.14@332.025,123.149
  Top Layer w0.61: C313.2@325.388,101.346 325.908,101.866 L307.1@325.908,104.628 328.448,104.628 L304.2@329.164,103.912
U24_17: C322.2 L309.2 L312.1 U24.17 | length 39.1
  Top Layer w0.305: L309.2@329.164,94.006 335.788,100.63 335.788,118.364 332.953,121.199 U24.17@332.025,121.199
  Top Layer w0.61: C322.2@325.388,91.44 325.908,91.96 L312.1@325.908,94.722 328.448,94.722 L309.2@329.164,94.006
U25_4: C306.2 L303.2 U25.4 | length 12.7
  Top Layer w0.305: U25.4@301.451,116.373 302.473,116.373 307.314,111.532 L303.2@307.574,111.532
  Top Layer w0.61: L303.2@307.574,111.532 311.364,111.532 C306.2@311.898,110.998
U25_7: C387.2 C390.2 L136.2 U25.7 | length 13.7
  Top Layer w0.305: U25.7@301.451,118.323 302.219,118.323 303.022,119.126 303.022,123.444 302.528,123.938 C390.2@302.528,124.206
  Top Layer w0.61: L136.2@300.502,127.228 300.528,127.254 C387.2@303.566,127.254 303.566,125.244 C390.2@302.528,124.206
U25_14: C312.2 C315.2 L306.2 U25.14 | length 27.9
  Top Layer w0.305: U25.14@295.449,118.323 297.729,118.323 298.196,117.856 v2(298.196,104.902)
  Top Layer w0.61: C315.2@302.26,104.916 306.296,104.916 C312.2@306.564,104.648 306.564,101.846 L306.2@306.044,101.326
  Bottom Layer w0.305: v2(298.196,104.902) C315.2@302.26,104.915
U25_17: C321.2 C324.2 L311.2 U25.17 | length 37.3
  Top Layer w0.305: U25.17@295.449,116.373 296.926,116.373 297.434,115.865 297.434,99.06 298.196,98.298 v2(298.196,93.472)
  Top Layer w0.61: C324.2@303.022,93.486 304.278,94.742 C321.2@306.564,94.742 306.044,94.222 L311.2@306.044,91.42
  Bottom Layer w0.305: v2(298.196,93.472) C324.2@303.022,93.485
U26_4: C346.2 L319.2 L322.1 U26.4 | length 20.5
  Top Layer w0.305: L319.2@327.386,73.94 332.74,73.939 332.74,71.12 335.239,68.621 U26.4@337.265,68.621
  Top Layer w0.61: C346.2@323.61,71.628 324.13,72.148 L322.1@324.13,74.656 326.67,74.656 L319.2@327.386,73.94
U26_7: C334.2 L314.2 L317.1 U26.7 | length 24.8
  Top Layer w0.305: L314.2@329.164,83.592 331.216,82.296 331.216,77.47 333.756,74.93 333.756,72.898 336.083,70.571 U26.7@337.265,70.571
  Top Layer w0.61: C334.2@325.388,81.026 325.908,81.546 L317.1@325.908,84.562 328.194,84.562 L314.2@329.164,83.592
U26_14: C360.2 L324.2 L327.1 U26.14 | length 15.2
  Top Layer w0.305: L324.2@327.386,64.542 327.386,68.052 329.905,70.571 U26.14@331.263,70.571
  Top Layer w0.61: C360.2@323.61,62.23 324.13,62.75 L327.1@324.13,65.258 326.67,65.258 L324.2@327.386,64.542
U26_17: C374.2 L329.2 L332.1 U26.17 | length 21.8
  Top Layer w0.305: L329.2@327.386,55.652 329.438,57.704 329.438,68.326 329.733,68.621 U26.17@331.263,68.621
  Top Layer w0.61: C374.2@323.61,53.086 324.13,53.606 L332.1@324.13,55.86 327.178,55.86 L329.2@327.386,55.652
U27_4: C345.2 C348.2 L321.2 U27.4 | length 12.4
  Top Layer w0.305: U27.4@299.927,77.511 300.695,77.511 301.244,76.962 301.244,76.454 C348.2@301.244,72.658
  Top Layer w0.61: C348.2@301.244,72.658 303.216,72.658 L321.2@304.266,71.608 ; C345.2@304.786,74.676 304.85,74.612 L321.2@304.85,71.628
U27_7: C333.2 C336.2 L316.2 U27.7 | length 12.7
  Top Layer w0.305: U27.7@299.927,79.461 301.457,79.461 303.022,81.026 C336.2@303.022,82.536
  Top Layer w0.61: C336.2@303.022,82.536 304.514,82.536 L316.2@306.044,81.006 306.564,81.526 C333.2@306.564,84.582
U27_14: C359.2 C362.2 L326.2 U27.14 | length 24.9
  Top Layer w0.305: U27.14@293.925,79.461 295.697,79.461 296.418,78.74 296.418,70.118 C362.2@301.244,65.292
  Top Layer w0.61: C362.2@301.244,65.291 C359.2@304.278,65.278 ; C359.2@304.278,65.278 304.278,61.786 L326.2@304.342,61.722
U27_17: C373.2 C376.2 L331.2 U27.17 | length 31.3
  Top Layer w0.305: U27.17@293.925,77.511 294.853,77.511 295.402,76.962 295.402,61.736 C376.2@301.244,55.894
  Top Layer w0.61: C376.2@301.244,55.893 C373.2@304.278,55.88 ; L331.2@303.758,53.066 304.278,53.586 C373.2@304.278,55.88
VHFAMP_IN: R23.2 R25.2 U4.4 U4.5 | length 11.3
  Top Layer w1.2: R23.2@106.376,147.828 R25.2@106.376,149.86 ; R25.2@106.376,149.606 106.376,152.878 106.406,152.908 U4.5@106.406,158.908
VHFAMPBIAS_ON: Q10.1 R45.2 U2.11 | length 85.4
  Top Layer w0.8: R45.2@133.604,117.806 Q10.1@136.414,117.79
  Bottom Layer w0.4: R45.2@133.604,117.806 135.941,120.142 157.48,120.142 173.736,136.398 180.34,136.398 188.468,144.526 202.733,144.526 U2.11@202.733,146.884
VHFBPF_OUT: L2.2 T6.1 | length 4
  Top Layer w1.8: T6.1@181.229,156.591 181.229,153.471 L2.2@181.864,152.836
VHFSWR_OUT: K24.5 K24.8 T6.2 | length 18.3
  Top Layer w1.8: T6.2@204.851,156.591 206.756,158.496 206.756,164.592 208.788,166.624 K24.8@210.312,166.624 K24.5@215.392,166.624
VHFSWRDETBACKW: R67.1 R68.1 U12.5 | length 30.1
  Top Layer w0.4: v2(187.452,138.43) 194.564,145.542 v2(196.088,147.066)
  Bottom Layer w0.4: U12.5@184.384,131.73 184.384,135.362 v2(187.452,138.43) ; v2(196.088,147.066) 196.134,147.112 R68.1@196.134,153.924
  Bottom Layer w0.8: R68.1@196.133,153.924 R67.1@196.133,156.972
VHFSWRDETFORW: R64.2 R65.1 U12.4 | length 36.4
  Top Layer w0.4: U12.4@184.384,125.73 186.69,128.036 186.69,138.938 191.262,143.51 v2(193.548,145.796)
  Bottom Layer w0.4: R64.2@190.201,153.924 193.548,150.576 v2(193.548,145.796)
  Bottom Layer w0.8: R64.2@190.201,153.924 R65.1@190.201,156.972
pads on no net: T5.5

## Polygon pours and split planes (outlines as drawn)
GND on Bottom Layer (solid): 279.4,178.308 55.88,178.308 55.88,138.43 53.594,136.144 281.686,136.144 282.194,135.636
GND on Bottom Layer (solid): 347.98,46.736 347.98,105.156 348.996,106.172 172.466,106.172 172.212,105.918 172.212,48.768 175.006,45.974
GND on Bottom Layer (solid): 270.764,182.626 270.764,103.886 273.05,101.6 346.71,101.6 347.726,100.584 347.726,181.102 347.218,181.61
GND on Bottom Layer (solid): 48.006,137.16 186.182,137.16 186.69,137.668 186.69,44.704 186.182,44.196 51.816,44.196 48.006,48.006
GND on Top Layer (solid): 186.944,193.802 186.944,44.45 186.69,44.196 38.608,44.196 38.1,44.704 38.1,193.04
GND on Top Layer (solid): 350.012,38.1 179.324,38.1 176.276,41.148 176.276,105.156 173.736,107.696 349.758,107.696
GND on Top Layer (solid): 363.728,106.807 271.272,106.807 271.272,136.144 186.69,136.144 186.436,199.009 357.886,199.009 361.696,195.199

## Other copper
Top Layer:
  region net L30_2: 151.39,57.426 154.09,57.426 154.09,53.826 151.39,53.826
  region net C58_2: 143.09,57.426 145.79,57.426 145.79,53.826 143.09,53.826
Bottom Layer:
  region net L30_2: 151.39,57.426 154.09,57.426 154.09,53.826 151.39,53.826
  region net C58_2: 143.09,57.426 145.79,57.426 145.79,53.826 143.09,53.826

## Silkscreen, mask and mechanical layers (free items; w line width, h text height)
Top Overlay:
  lines w0.254: 178.562,49.822 291.562,49.822 291.562,99.822 178.562,99.822 178.562,49.822 ; 188.204,105.537 282.204,105.537 282.204,142.367 188.204,142.367 188.204,105.537
  text "+" at 82.848,173.184 h2.03 r225
  text "+" at 151.174,138.132 h2.03 r225
  text "2m" at 326.136,121.92 h2.03
  text "HPF" at 330.962,108.204 h2.03
  text "10m" at 332.74,102.616 h2.03
  text "UA3REO Transceiver RF-UNIT-BIG-D-rev2 (RU4PN)" at 187.96,101.6 h2.03
  text "12m" at 332.74,100.076 h2.03
  text "15m" at 332.74,93.98 h2.03
  text "17m" at 332.74,91.44 h2.03
  text "20m" at 332.74,88.9 h2.03
  text "30m" at 332.994,80.264 h2.03
  text "40m" at 292.354,70.358 h2.03
  text "80m" at 292.354,62.23 h2.03
  text "+" at 158.54,61.424 h2.03 r225
  text "160m" at 291.592,53.34 h2.03
Top Paste:
  region net L30_2: 151.39,57.426 154.09,57.426 154.09,53.826 151.39,53.826
  region net C58_2: 143.09,57.426 145.79,57.426 145.79,53.826 143.09,53.826
Bottom Paste:
  region net L30_2: 151.39,57.426 154.09,57.426 154.09,53.826 151.39,53.826
  region net C58_2: 143.09,57.426 145.79,57.426 145.79,53.826 143.09,53.826
Top Solder:
  region net L30_2: 151.39,57.426 154.09,57.426 154.09,53.826 151.39,53.826
  region net C58_2: 143.09,57.426 145.79,57.426 145.79,53.826 143.09,53.826
Bottom Solder:
  region net L30_2: 151.39,57.426 154.09,57.426 154.09,53.826 151.39,53.826
  region net C58_2: 143.09,57.426 145.79,57.426 145.79,53.826 143.09,53.826

## Text inside footprints (layer, text, board x,y; h text height)
TSWR: Top Overlay "IN" at 167.894,112.776 h2.03 r90; Top Overlay "OUT" at 177.038,112.014 h2.03